# Altium PCB Charger Board.PcbDoc
Units mm, origin at the board's own origin, x right, y up, seen from the top; angles counter-clockwise.
Board outline 33.5 x 11 mm, 2 copper layers (Top Layer, Bottom Layer), stack 1.569 mm thick; 11 components, 10 nets, 45 pads, 7 vias.
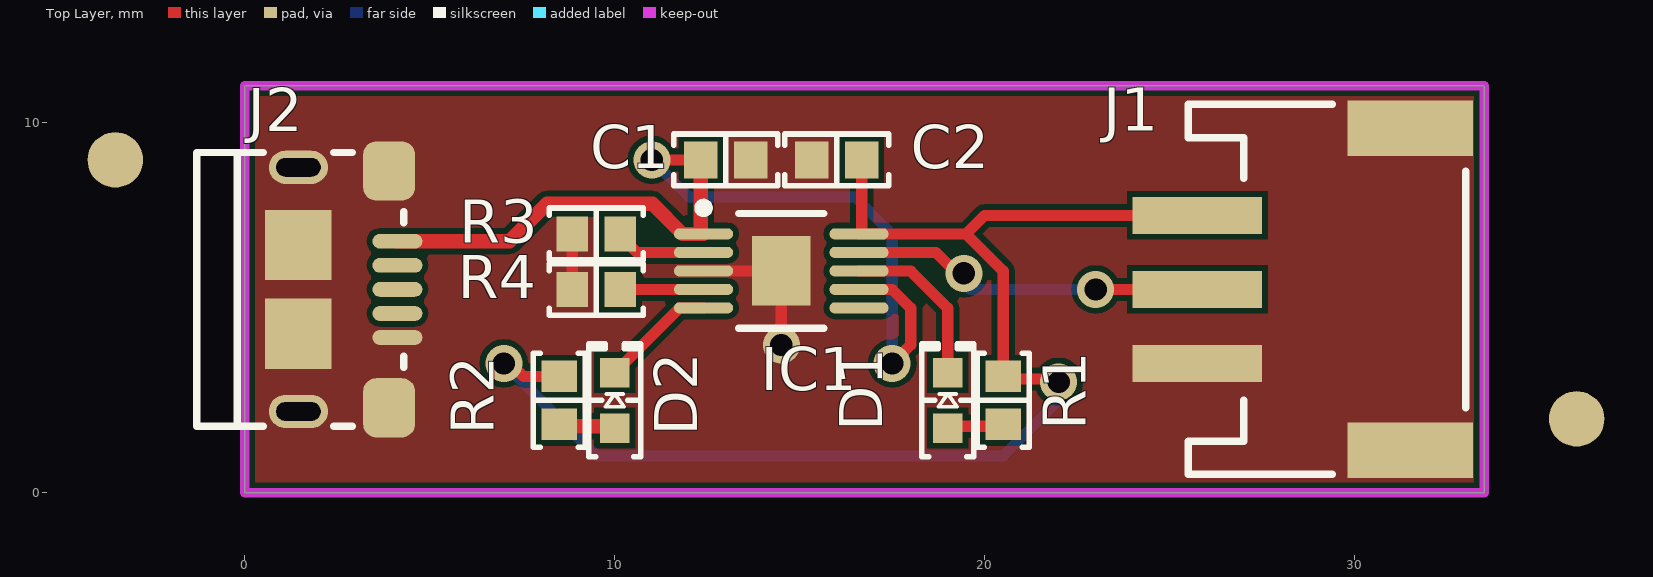
[diagram p0: Top Layer view]
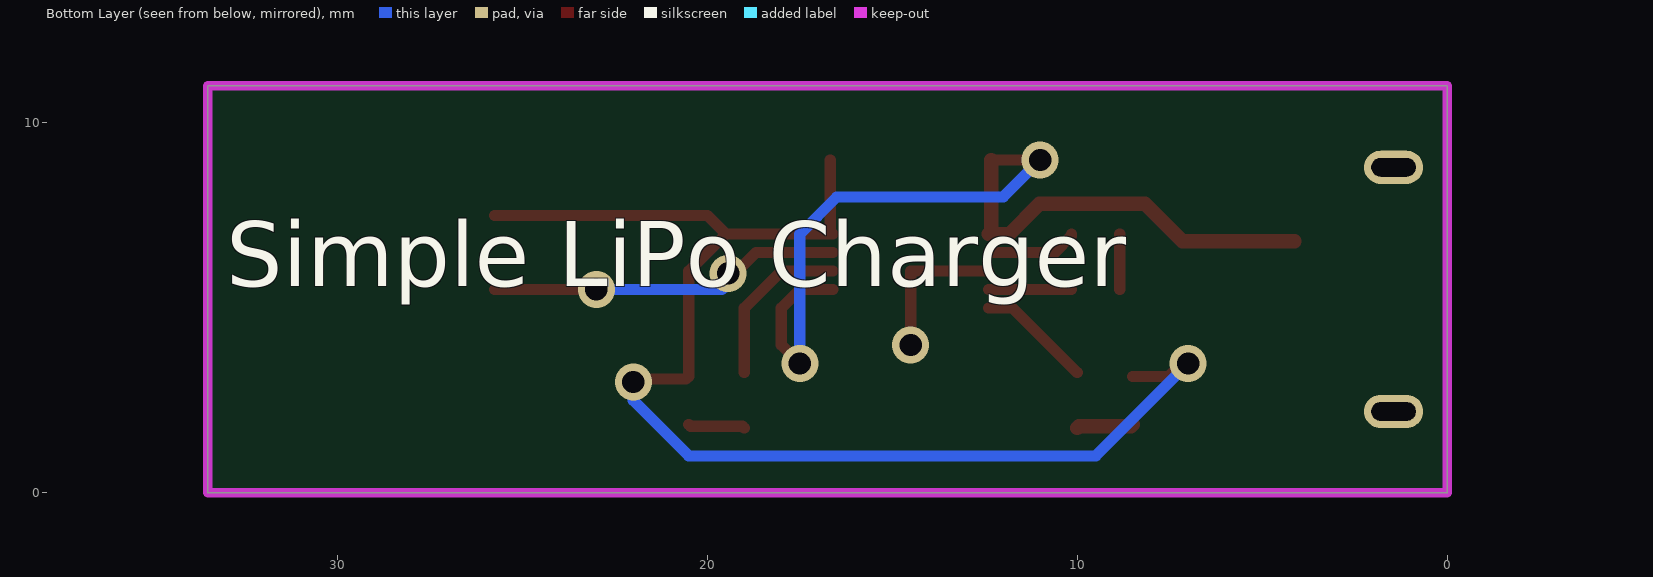
[diagram p1: Bottom Layer view, seen from below]
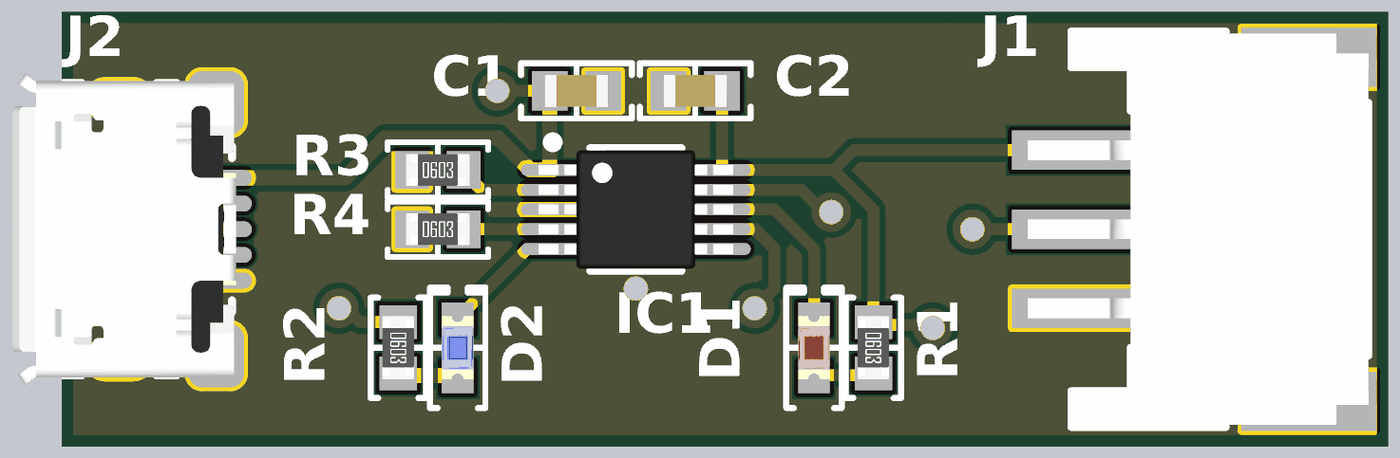
[diagram p2: 3D render of the assembled board from above, using the file's embedded part models]

## Layer stack, top to bottom
Top Solder: solder mask 0.0254, SM-001, Dk 4
Top Layer: signal copper 0.035
Dielectric 1: core 1.4986, Core-043, Dk 4.3
Bottom Layer: signal copper 0.035
Bottom Solder: solder mask 0.0254, SM-001, Dk 4

## Board outline
0,0 33.5,0 33.5,11 0,11

## Design rules (kind name [scope] priority, off if disabled: settings)
Clearance [All] p1: gap=0.15 ignorepadtopadclearanceinfootprint=FALSE
PolygonConnect [All] p1: connectstyle=Direct reliefconductorwidth=0.254 reliefentries=4 polygonreliefangle="90 Angle" airgapwidth=0.254
RoutingVias [All] p1: holewidth=0.6 width=1 viastyle="Through Hole" minholewidth=0.2 minwidth=0.45 maxholewidth=1 maxwidth=1.5
SolderMaskExpansion "SolderMaskExpansion Vias" [IsVia] p1: expansion=0.102 istentingtop=TRUE
SolderMaskExpansion [All] p2: expansion=0.102 istentingtop=FALSE
Width [All] p1: maxlimit=2 minlimit=0.15 preferedwidth=0.3
30 further rules are at their usual default settings.

## Components (designator, comment, footprint, x,y, rotation, side; value= is the part's Value field where it differs from the comment)
C1 "1µF" "CAP 0603_1608" 13,9 r180 top
C2 "1µF" "CAP 0603_1608" 16,9 r0 top
D1 "Red" "LED 0603_1608 RED" 19,2.5 r90 top
D2 "Blue" "LED 0603_1608 BLUE" 10,2.5 r90 top
IC1 "BQ24092DGQT" "TI PDSO-10 DCQ" 14.5,6 r0 top
J1 "S3B-PH-SM4-TB(LF)(SN)" "JST S3B-PH-SM4-TB" 30,5.5 r270 top
J2 "10118193-0001LF" "FCI USB 10118193-0001LF" 1.5,5.5 r90 top
R1 "1.5 kOhms" "RES 0603_1608" 20.5,2.5 r270 top
R2 "1.5 kOhms" "RES 0603_1608" 8.5,2.5 r270 top
R3 "1 kOhms" "RES 0603_1608" 9.5,7 r0 top
R4 "2 kOhms" "RES 0603_1608" 9.5,5.5 r0 top

## Footprints (in the part's own frame and the unit in brackets; to place one, negate y for a bottom-side part, rotate by r counter-clockwise, add the part's x,y. Pads: shape width x height; smd on the part's side, far side on the other; paste and mask are expansions set on the pad)
"CAP 0603_1608" [mm] "Chip Capacitor, 2-Leads, Body 1.60x0.80mm, IPC Medium Density"
  rect 0.9x1 smd: 1(-0.675,0) 2(0.675,0)
  silkscreen extent -1.4,-0.7 1.4,0.7, body extent -0.8,-0.41 0.8,0.41, height 0.82
"FCI USB 10118193-0001LF" [mm] "USB 2.0 Type B Micro"
  oval 0.4x1.35 smd: 1(1.3,-2.625) 2(0.65,-2.625) 3(0,-2.625) 4(-0.65,-2.625) 5(-1.3,-2.625)
  oval 0.9x1.6 hole 0.5 slot 1.2 at 90 deg: S(-3.3,0.05) S(3.3,0.05)
  rrect50% 1.6x1.4 smd: S(-3.2,-2.4) S(3.2,-2.4)
  rect 1.9x1.8 smd: S(-1.2,0.05) S(1.2,0.05)
  silkscreen extent -3.7,-2.8 3.7,2.8, body extent -3.93,-2.9 3.93,2.76, height 2.78
"JST S3B-PH-SM4-TB" [mm] "JST PH Series 2mm pitch, side entry connector"
  rect 1x3.5 smd: 1(-2,-4.25) 2(0,-4.25) 3(2,-4.25)
  rect 1.5x3.4 smd: M(-4.35,1.5) M(4.35,1.5)
  silkscreen extent -5,-4.5 5,3, body extent -4.95,-5.6 4.95,3.01, height 5.6
"LED 0603_1608 BLUE" [mm] "Chip Diode, 2-Leads, Body 1.60x0.80mm, IPC Medium Density"
  rect 0.8x0.8 smd: 1(-0.75,0) 2(0.75,0)
  silkscreen extent -1.52,-0.7 1.52,0.7, body extent -0.8,-0.4 0.8,0.4, height 0.53
"LED 0603_1608 RED" [mm] "Chip Diode, 2-Leads, Body 1.60x0.80mm, IPC Medium Density"
  rect 0.8x0.8 smd: 1(-0.75,0) 2(0.75,0)
  silkscreen extent -1.52,-0.7 1.52,0.7, body extent -0.8,-0.4 0.8,0.4, height 0.53
"RES 0603_1608" [mm] "Chip Resistor, 2-Leads, Body 1.60x0.80mm, IPC Medium Density"
  rect 0.85x0.95 smd: 1(-0.65,0) 2(0.65,0)
  silkscreen extent -1.27,-0.7 1.27,0.7, body extent -0.8,-0.4 0.8,0.4, height 0.45
"TI PDSO-10 DCQ" [mm] "PDTSSOP, 10-Leads, Body 3.00x3.00mm, Pitch 0.50mm, Thermal Pad 1.88x1.57mm, IPC Medium Density"
  oval 1.6x0.3 smd: 1(-2.1,1) 2(-2.1,0.5) 3(-2.1,0) 4(-2.1,-0.5) 5(-2.1,-1) 6(2.1,-1) 7(2.1,-0.5) 8(2.1,0) 9(2.1,0.5) 10(2.1,1)
  rect 1.57x1.88 smd: 11(0,0)
  silkscreen extent -2.22,-1.55 1.15,1.82, body extent -2.46,-1.5 2.46,1.5, height 1.05

## Part data
C1 C2: library part CC0603KRX5R8BB105, "CAP CER 1UF 25V X5R 0603", Device Package="0603 (1608 Metric)", Manufacturer=Yageo, Operating Temperature="-55°C ~ 85°C", Supplier Part Number 1=311-1445-1-ND, Temperature Coefficient=X5R, Tolerance=±10%, Voltage - Rated=25V, Applications="General Purpose", Capacitance=1µF, ComponentLink1Description=Datasheet, ComponentLink1URL=https://www.yageo.com/upload/media/product/productsearch/datasheet/mlcc/UPY-GPHC_X5R_4V-to-50V_25.pdf, ComponentLink2Description="DigiKey Link", ComponentLink2URL=http://digikey.com/product-detail/en/yageo/CC0603KRX5R8BB105/311-1445-1-ND/2833751, LastUpdated="21/01/2020 00:02:05", Lifecycle Status=Active, Minimum Order=1, Mounting Type="Surface Mount, MLCC", Package / Case="0603 (1608 Metric)", Packaging=TapeAndReel, Part Number=CC0603KRX5R8BB105, Part Status=Active, PartId=5146, Price=0.01, Series=CC, Size / Dimension="0.063\" L x 0.031\" W (1.60mm x 0.80mm)", Supplier 1=DigiKey, Thickness (Max)="0.035\" (0.90mm)"
D1: library part 19-213USRC/S259/TR8, "LED RED CLEAR 2SMD", Current - Test=25mA, Device Package="0603 (1608 Metric)", Lens Color=Colorless, Manufacturer="Everlight Electronics Co Ltd", Supplier Device Package=2-SMD, Supplier Part Number 1=1080-1583-1-ND, Voltage - Forward (Vf) (Typ)=2.1V, Color=Red, ComponentLink1Description=Datasheet, ComponentLink1URL=//media.digikey.com/pdf/Data%20Sheets/Everlight%20PDFs/19-213USRC-S259-TR8.pdf, ComponentLink2Description="DigiKey Link", ComponentLink2URL=http://digikey.com/product-detail/en/everlight-electronics-co-ltd/19-213USRC-S259-TR8/1080-1583-1-ND/8535306, Configuration=Standard, Height (Max)=0.70mm, LastUpdated="21/01/2020 03:13:21", Lens Size="1.20mm x 0.80mm", Lens Style="Rectangle with Flat Top", Lens Transparency=Clear, Lifecycle Status=Active, Minimum Order=1, Mounting Type="Surface Mount", Package / Case="0603 (1608 Metric)", Packaging=TapeAndReel, Part Number=19-213USRC/S259/TR8, Part Status=Active, PartId=415, Price=0.03, Series=-, Size / Dimension="1.60mm L x 0.80mm W", Supplier 1=DigiKey, Viewing Angle=120°, Wavelength - Peak=639nm
D2: library part EAST16084BA8, "LED BLUE CLEAR 2SMD", Current - Test=5mA, Device Package="0603 (1608 Metric)", Lens Color=Colorless, Manufacturer="Everlight Electronics Co Ltd", Supplier Device Package=2-SMD, Supplier Part Number 1=1080-1562-1-ND, Voltage - Forward (Vf) (Typ)=2.8V, Color=Blue, ComponentLink1Description=Datasheet, ComponentLink1URL=https://everlightamericas.com/index.php?controller=attachment&id_attachment=3217, ComponentLink2Description="DigiKey Link", ComponentLink2URL=http://digikey.com/product-detail/en/everlight-electronics-co-ltd/EAST16084BA8/1080-1562-1-ND/8510390, Configuration=Standard, Height (Max)=0.50mm, LastUpdated="21/01/2020 03:10:56", Lens Size="1.00mm x 0.80mm", Lens Style="Rectangle with Flat Top", Lens Transparency=Clear, Lifecycle Status=Active, Minimum Order=1, Mounting Type="Surface Mount", Package / Case="0603 (1608 Metric)", Packaging=TapeAndReel, Part Number=EAST16084BA8, Part Status=Active, PartId=800, Price=0.05, Series=-, Size / Dimension="1.60mm L x 0.80mm W", Supplier 1=DigiKey, Viewing Angle=120°, Wavelength - Peak=468nm
IC1: "IC BATT CHARGER LI-ION 10MSOP", Battery Pack Voltage=4.2V, Charge Current - Max=1A, Current - Charging="Constant - Programmable", Device Package="10-TFSOP, 10-MSOP (0.118\", 3.00mm Width) Exposed Pad", Manufacturer="Texas Instruments", Operating Temperature="0°C ~ 125°C (TJ)", Supplier Device Package=10-MSOP-PowerPad, Supplier Part Number 1=296-27510-2-ND, Voltage - Supply (Max)=6.45V, Battery Chemistry="Lithium Ion/Polymer", ComponentLink1Description=Datasheet, ComponentLink1URL=http://www.ti.com/general/docs/suppproductinfo.tsp?distId=10&gotoUrl=http%3A%2F%2Fwww.ti.com%2Flit%2Fgpn%2Fbq24092, ComponentLink2Description="DigiKey Link", ComponentLink2URL=//digikey.com/product-detail/en/texas-instruments/BQ24092DGQT/296-27510-2-ND/2325817, Fault Protection="Over Temperature, Over Voltage, Short Circuit", Interface=USB, LastUpdated="08/12/2019 03:15:42", Lifecycle Status=0, Minimum Order=1, Mounting Type="Surface Mount", Number of Cells=1, Package / Case="10-TFSOP, 10-MSOP (0.118\", 3.00mm Width) Exposed Pad", Packaging=TapeAndReel, Part Number=BQ24092DGQT, Part Status=Active, PartId=25, Price=0.83, Programmable Features=Current, Series=-, Supplier 1=DigiKey
J1: "CONN HEADER SMD R/A 3POS 2MM", Current Rating (Amps)=2A, Insulation Color=Natural, Manufacturer="JST Sales America Inc.", Material Flammability Rating="UL94 V-0", Operating Temperature="-25°C ~ 85°C", Supplier Part Number 1=455-1750-1-ND, Voltage Rating=100V, ComponentLink1Description=Datasheet, ComponentLink1URL=http://www.jst-mfg.com/product/pdf/eng/ePH.pdf, ComponentLink2Description="DigiKey Link", ComponentLink2URL=http://digikey.com/product-detail/en/jst-sales-america-inc/S3B-PH-SM4-TB-LF-SN/455-1750-1-ND/926847, Connector Type=Header, Contact Finish - Mating=Tin, Contact Finish - Post=Tin, Contact Length - Mating="0.130\" (3.30mm)", Contact Material="Copper Alloy", Contact Shape=Square, Contact Type="Male Pin", Fastening Type="Detent Lock", Features="Solder Retention", Insulation Height="0.217\" (5.51mm)", Insulation Material="Polyamide (PA6T), Nylon 6T", LastUpdated="15/01/2020 03:45:23", Lifecycle Status=Active, Minimum Order=1, Mounting Type="Surface Mount, Right Angle", Number of Positions=3, Number of Positions Loaded=All, Number of Rows=1, Packaging=TapeAndReel, Part Number=S3B-PH-SM4-TB(LF)(SN), Part Status=Active, PartId=116, Pitch - Mating="0.079\" (2.00mm)", Price=0.32, Series=PH, Shrouding="Shrouded - 4 Wall", Style="Board to Cable/Wire", Supplier 1=DigiKey, Termination=Solder
J2: "CONN RCPT USB2.0 MICRO B SMD R/A", Current Rating (Amps)="1.8A per Contact", Manufacturer="Amphenol ICC (FCI)", Operating Temperature="-30°C ~ 80°C", Supplier Part Number 1=609-4616-2-ND, Voltage - Rated=100VAC, ComponentLink1Description=Datasheet, ComponentLink1URL=https://cdn.amphenol-icc.com/media/wysiwyg/files/documentation/datasheet/inputoutput/io_usb_micro.pdf, ComponentLink2Description="DigiKey Link", ComponentLink2URL=//digikey.com/product-detail/en/amphenol-icc-fci/10118193-0001LF/609-4616-2-ND/2785388, Connector Type="USB - micro B", Features="Solder Retention", Gender=Receptacle, LastUpdated="09/12/2019 20:51:28", Lifecycle Status=0, Mating Cycles=10000, Minimum Order=1, Mounting Feature=Horizontal, Mounting Type="Surface Mount, Right Angle; Through Hole", Number of Contacts=5, Number of Ports=1, Packaging=TapeAndReel, Part Number=10118193-0001LF, Part Status=Active, Price=0.21, Series=-, Shielding=Shielded, Specifications="USB 2.0", Supplier 1=DigiKey, Termination=Solder
R1 R2: library part ERJ-3EKF1501V, "RES SMD 1.5K OHM 1% 1/10W 0603", Device Package="0603 (1608 Metric)", Manufacturer="Panasonic Electronic Components", Operating Temperature="-55°C ~ 155°C", Power (Watts)="0.1W, 1/10W", Ratings=AEC-Q200, Supplier Device Package=0603, Supplier Part Number 1=P1.50KHCT-ND, Temperature Coefficient=±100ppm/°C, Tolerance=±1%, ComponentLink1Description=Datasheet, ComponentLink1URL=https://industrial.panasonic.com/cdbs/www-data/pdf/RDA0000/AOA0000C304.pdf, ComponentLink2Description="DigiKey Link", ComponentLink2URL=http://digikey.com/product-detail/en/panasonic-electronic-components/ERJ-3EKF1501V/P1.50KHCT-ND/198088, Composition="Thick Film", Features="Automotive AEC-Q200", Height - Seated (Max)="0.022\" (0.55mm)", LastUpdated="21/01/2020 00:24:38", Lifecycle Status=Active, Minimum Order=1, Number of Terminations=2, Package / Case="0603 (1608 Metric)", Packaging=TapeAndReel, Part Number=ERJ-3EKF1501V, Part Status=Active, PartId=5637, Price=0.01, Resistance="1.5 kOhms", Series=ERJ, Size / Dimension="0.063\" L x 0.031\" W (1.60mm x 0.80mm)", Supplier 1=DigiKey
R3: library part ERJ-PA3J102V, "RES SMD 1K OHM 5% 1/4W 0603", Device Package="0603 (1608 Metric)", Manufacturer="Panasonic Electronic Components", Operating Temperature="-55°C ~ 155°C", Power (Watts)="0.25W, 1/4W", Ratings=AEC-Q200, Supplier Device Package=0603, Supplier Part Number 1=P1KBZCT-ND, Temperature Coefficient=±200ppm/°C, Tolerance=±5%, ComponentLink1Description=Datasheet, ComponentLink1URL=https://industrial.panasonic.com/cdbs/www-data/pdf/RDO0000/AOA0000C331.pdf, ComponentLink2Description="DigiKey Link", ComponentLink2URL=http://digikey.com/product-detail/en/panasonic-electronic-components/ERJ-PA3J102V/P1KBZCT-ND/5036236, Composition="Thick Film", Features="Automotive AEC-Q200, Pulse Withstanding", Height - Seated (Max)="0.022\" (0.55mm)", LastUpdated="21/01/2020 00:19:49", Lifecycle Status=Active, Minimum Order=1, Number of Terminations=2, Package / Case="0603 (1608 Metric)", Packaging=TapeAndReel, Part Number=ERJ-PA3J102V, Part Status=Active, PartId=17507, Price=0.01, Resistance="1 kOhms", Series=ERJ, Size / Dimension="0.063\" L x 0.031\" W (1.60mm x 0.80mm)", Supplier 1=DigiKey
R4: library part ERJ-PA3J202V, "RES SMD 2K OHM 5% 1/4W 0603", Device Package="0603 (1608 Metric)", Manufacturer="Panasonic Electronic Components", Operating Temperature="-55°C ~ 155°C", Power (Watts)="0.25W, 1/4W", Ratings=AEC-Q200, Supplier Device Package=0603, Supplier Part Number 1=P2KBZCT-ND, Temperature Coefficient=±200ppm/°C, Tolerance=±5%, ComponentLink1Description=Datasheet, ComponentLink1URL=https://industrial.panasonic.com/cdbs/www-data/pdf/RDO0000/AOA0000C331.pdf, ComponentLink2Description="DigiKey Link", ComponentLink2URL=http://digikey.com/product-detail/en/panasonic-electronic-components/ERJ-PA3J202V/P2KBZCT-ND/5036279, Composition="Thick Film", Features="Automotive AEC-Q200, Pulse Withstanding", Height - Seated (Max)="0.022\" (0.55mm)", LastUpdated="21/01/2020 00:23:23", Lifecycle Status=Active, Minimum Order=1, Number of Terminations=2, Package / Case="0603 (1608 Metric)", Packaging=TapeAndReel, Part Number=ERJ-PA3J202V, Part Status=Active, PartId=8961, Price=0.01, Resistance="2 kOhms", Series=ERJ, Size / Dimension="0.063\" L x 0.031\" W (1.60mm x 0.80mm)", Supplier 1=DigiKey

## Free pads (board coordinates)
  round 1.5 smd paste-2 mask+1.5: G(-3.5,9) G(36,2)

## Via types
v1: diameter 1, hole 0.6, Top Layer to Bottom Layer, tented both sides, 7 vias

## Nets (pads, with @x,y where several pads share a name; then routed paths per layer and width w, separated by ;. In a path a pad name is that pad's centre, name@x,y a point inside that pad or via, vN(x,y) a via of type N, cw(c..) or ccw(c..) an arc to the next point about the centre after c; other vN are vias at no path point)
CHG: D1.2 IC1.8 | length 4.6
  Top Layer w0.3: IC1.8 18,6 19,5 D1.2
CHG_LED: D1.1 R1.2 | length 1.5
  Top Layer w0.3: D1.1 19.05,1.8 20.45,1.8 R1.2
GND: C1.1 C2.1 IC1.3 IC1.11 J1.3 J1.M J2.5 J2.S R3.1 R4.1 | length 5.6
  Top Layer w0.3: R4.1 R3.1 ; IC1.3 IC1.11 v1(14.5,4)
ISET: IC1.2 R3.2 | length 2.5
  Top Layer w0.3: R3.2 10.15,6.95 10.6,6.5 IC1.2
PG: D2.2 IC1.5 | length 3.1
  Top Layer w0.3: D2.2 11.75,5 IC1.5
PG_LED: D2.1 R2.2 | length 1.5
  Top Layer w0.381: R2.2 8.55,1.8 9.95,1.8 D2.1
TERM: IC1.4 R4.2 | length 2.2
  Top Layer w0.3: R4.2 IC1.4
TSENSE: IC1.9 J1.2 | length 9.7
  Top Layer w0.3: IC1.9 18.679,6.5 19.245,5.934 v1(19.434,5.934) ; v1(23,5.5) J1.2
  Bottom Layer w0.3: v1(19.434,5.934) 19.568,5.8 19.568,5.532 19.6,5.5 v1(23,5.5)
VBATT: C2.2 IC1.10 J1.1 R1.1 R2.1 | length 36
  Top Layer w0.3: v1(7,3.5) 7.189,3.5 7.539,3.15 R2.1 ; IC1.10 IC1.10@16.675,7 ; C2.2 IC1.10@16.675,7 ; v1(22,3) 21.925,3.075 20.575,3.075 R1.1 20.5,6 19.5,7 ; J1.1 20,7.5 19.5,7 ; IC1.10@16.675,7 19.5,7
  Bottom Layer w0.3: v1(7,3.5) 9.5,1 20.5,1 22,2.5 v1(22,3)
VCC: C1.2 IC1.1 IC1.7 J2.1 | length 26.5
  Top Layer w0.3: v1(11,9) C1.2 ; IC1.7 17.5,5.5 18,5 18,4 v1(17.5,3.5)
  Top Layer w0.381: J2.1 7.155,6.8 8.17,7.815 11.015,7.815 11.831,7 IC1.1@12.365,7 ; C1.2 12.325,7.04 IC1.1@12.365,7 ; IC1.1 IC1.1@12.365,7
  Bottom Layer w0.3: v1(11,9) 12,8 16.5,8 17.5,7 v1(17.5,3.5)
pads on no net: IC1.6 J2.2 J2.3 J2.4

## Polygon pours and split planes (outlines as drawn)
GND on Top Layer "GND_L01_P000" (solid, remove dead copper, pour order 0): 0,11 0,0 33.5,0 33.5,11

## Keep-outs
Keep-Out Layer:
  the board outline again, w0.254

## Silkscreen, mask and mechanical layers (free items; w line width, h text height)
Bottom Overlay:
  text "Simple LiPo Charger" at 33,5 h3
Route Tool Path:
  lines w3: -0.5,-1.5 34,-1.5 ; -0.5,12.5 34,12.5